# Altium PCB LC_FlowPCB_V6.3.PcbDoc
Units mil, origin at the board's own origin, x right, y up, seen from the top; angles counter-clockwise.
Board outline 984.25 x 984.25 mil, 4 copper layers (Top Layer, GND, VCC, Bottom Layer), stack 23.756 mil thick; 52 components, 43 nets, 210 pads, 96 vias.
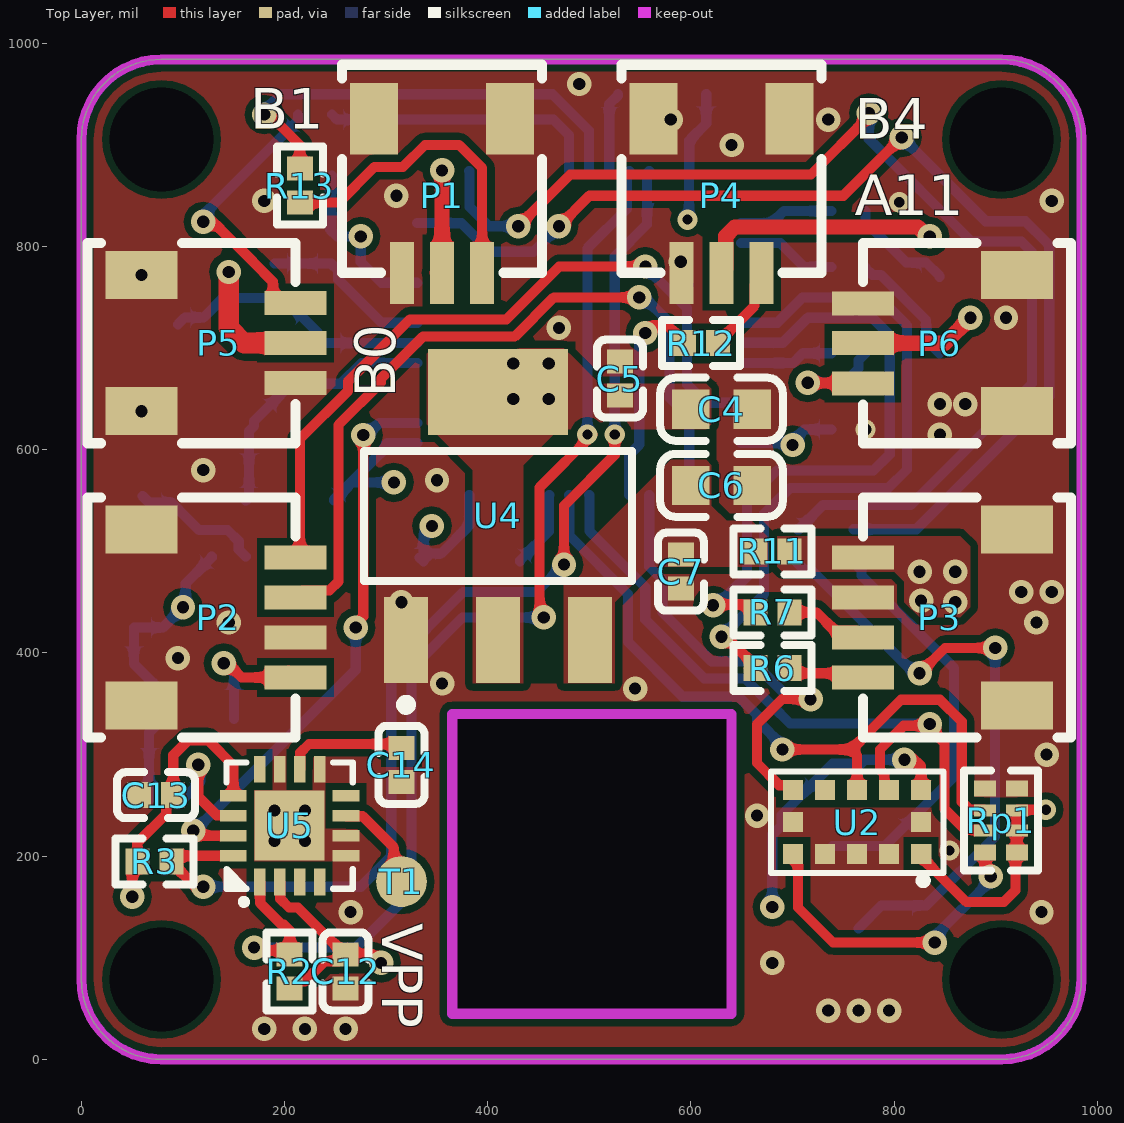
[diagram p0: Top Layer view]
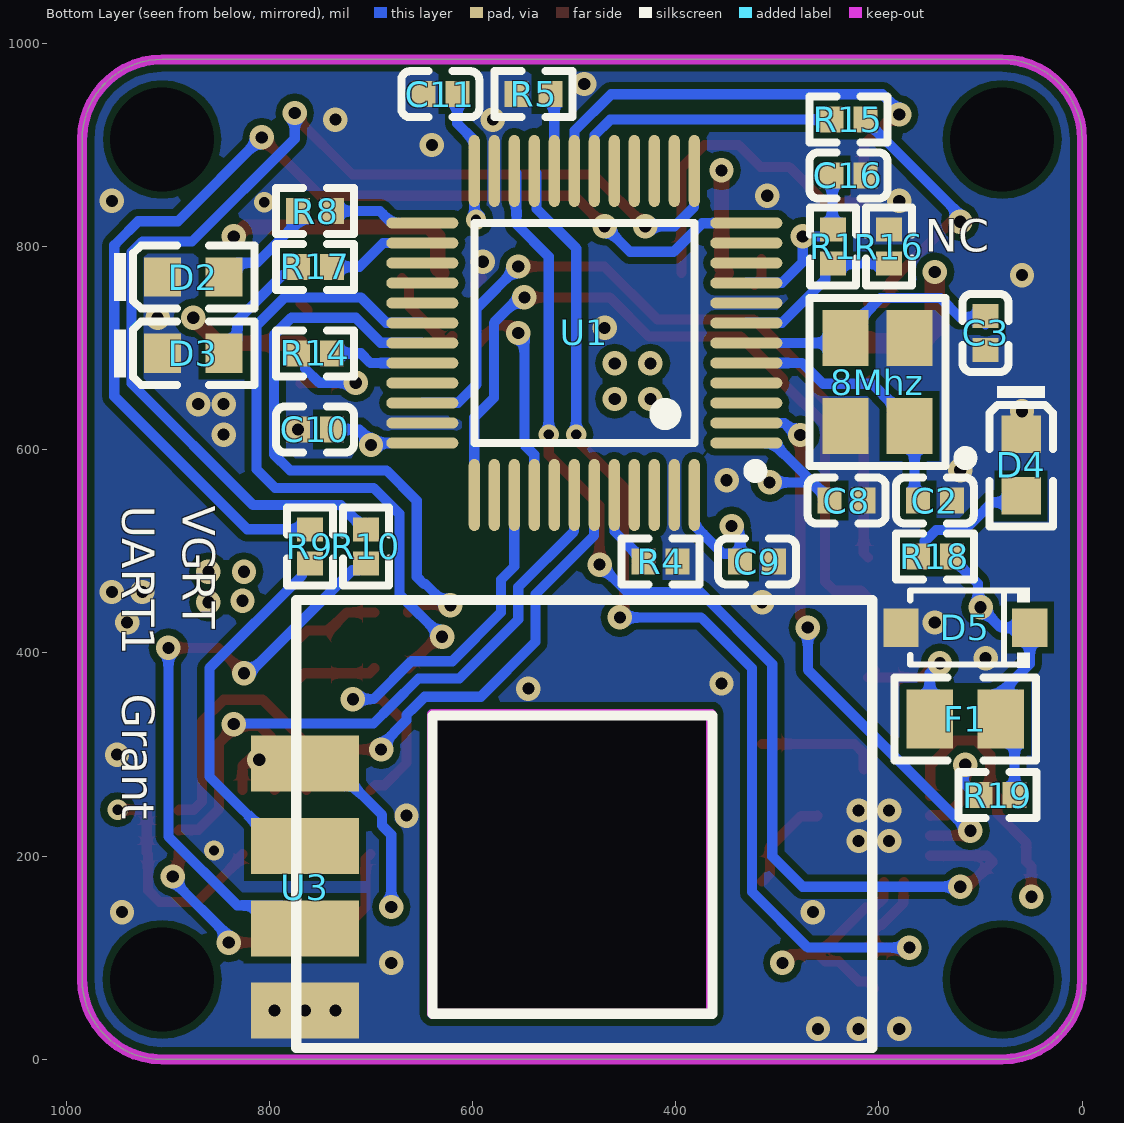
[diagram p1: Bottom Layer view, seen from below]
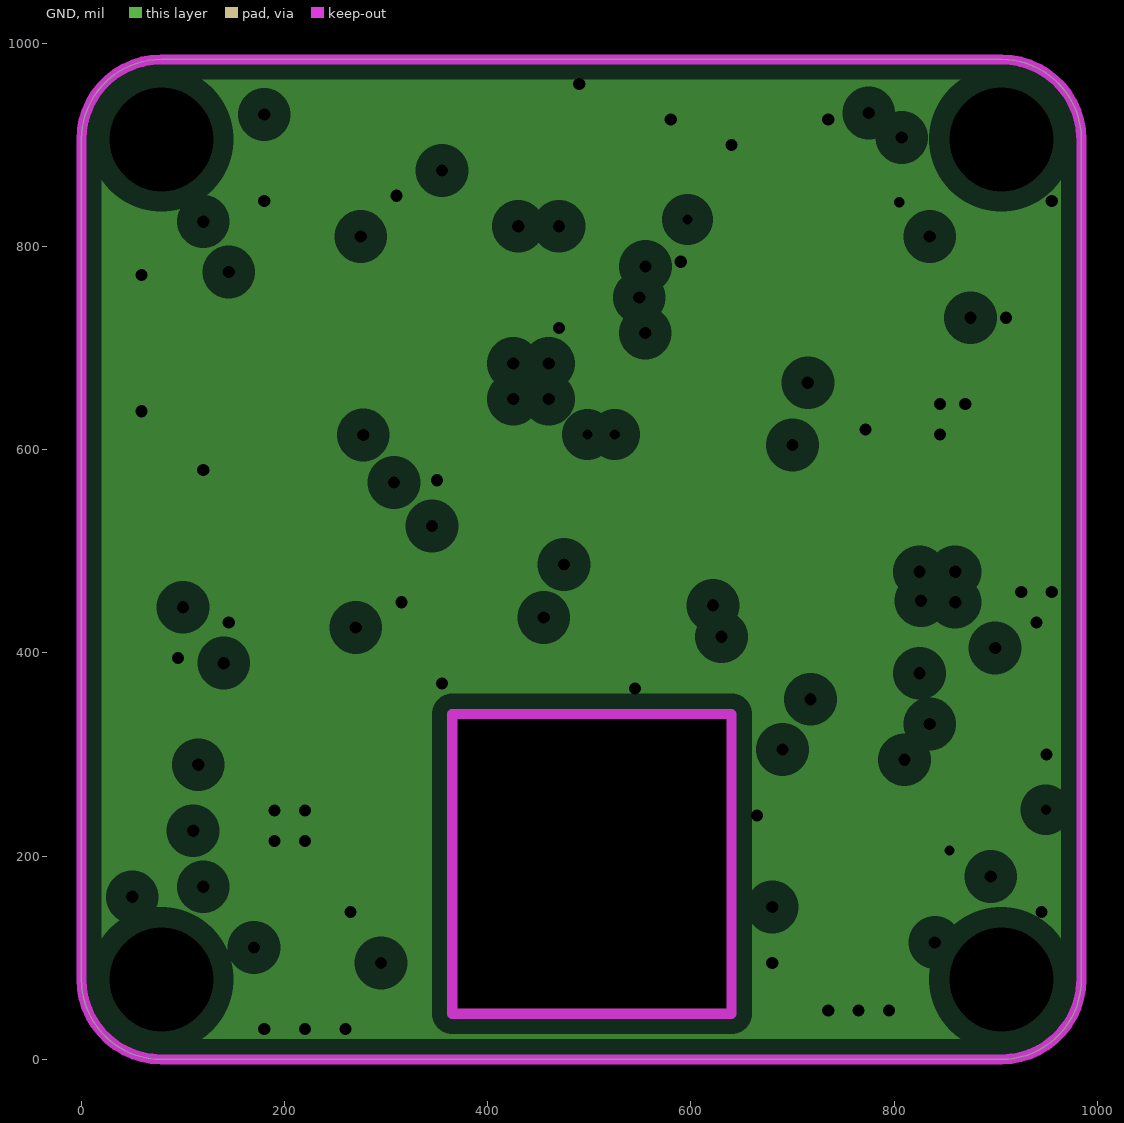
[diagram p2: GND, clearances drawn from the general rule]
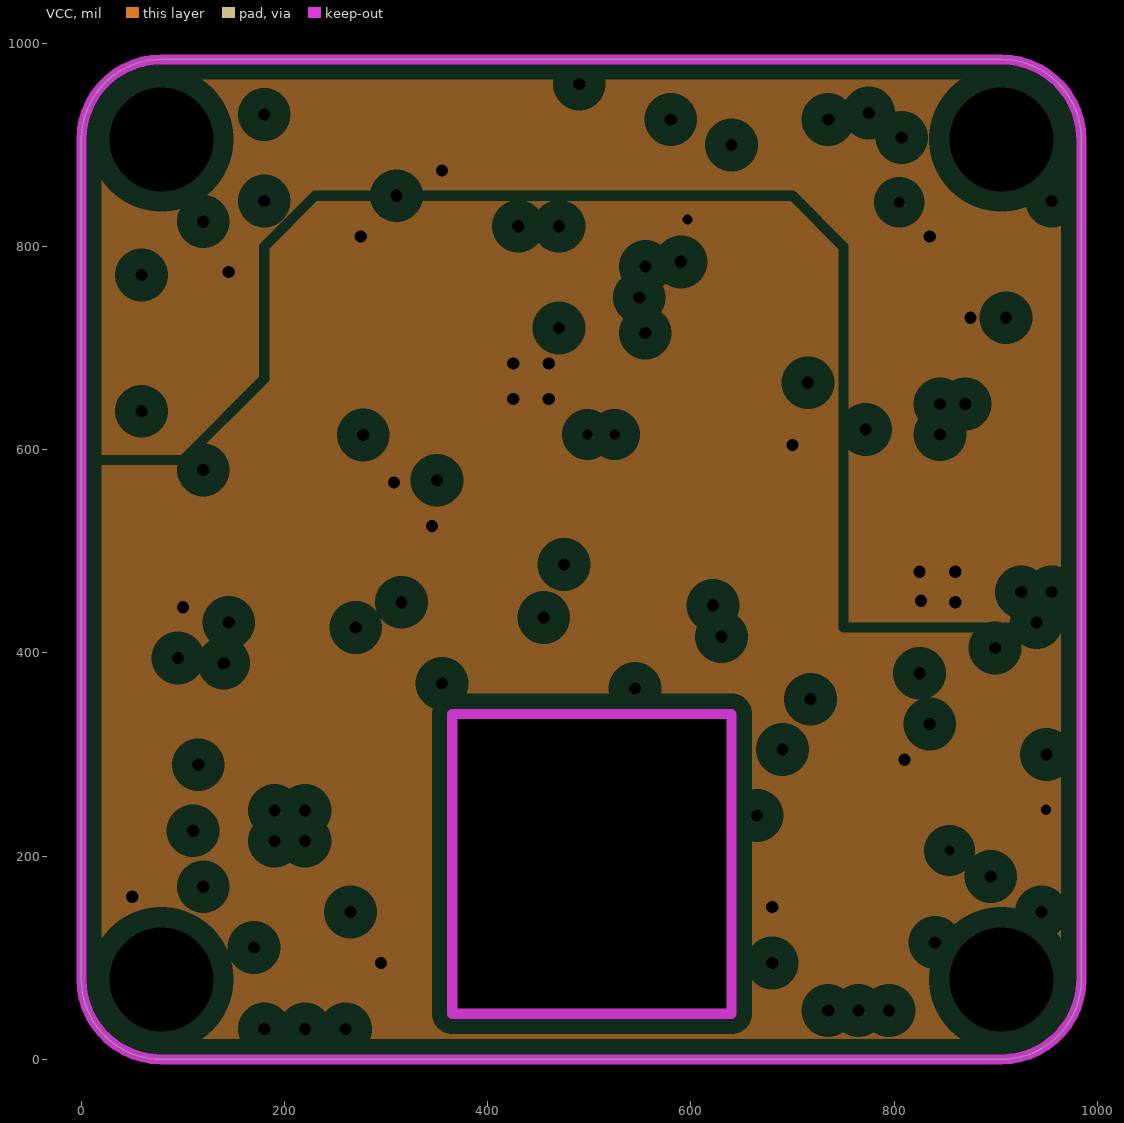
[diagram p3: VCC, clearances drawn from the general rule]
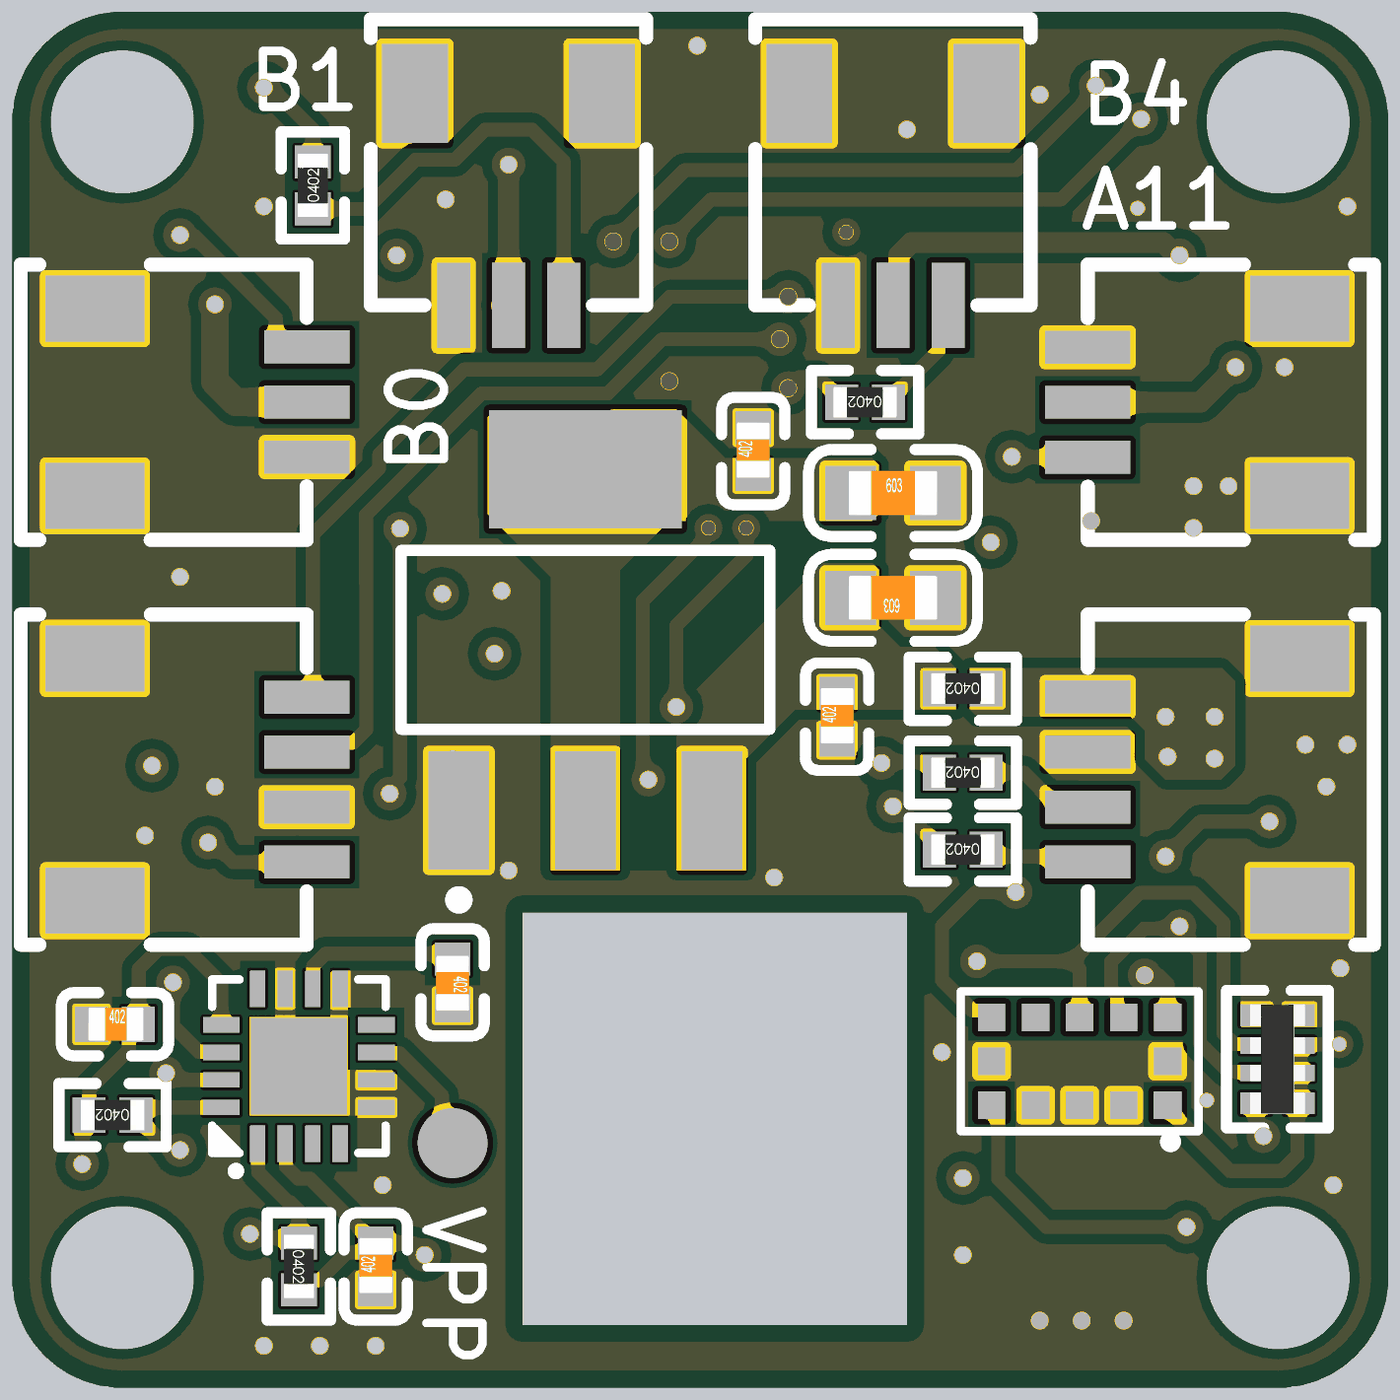
[diagram p4: 3D render of the assembled board from above, using the file's embedded part models]
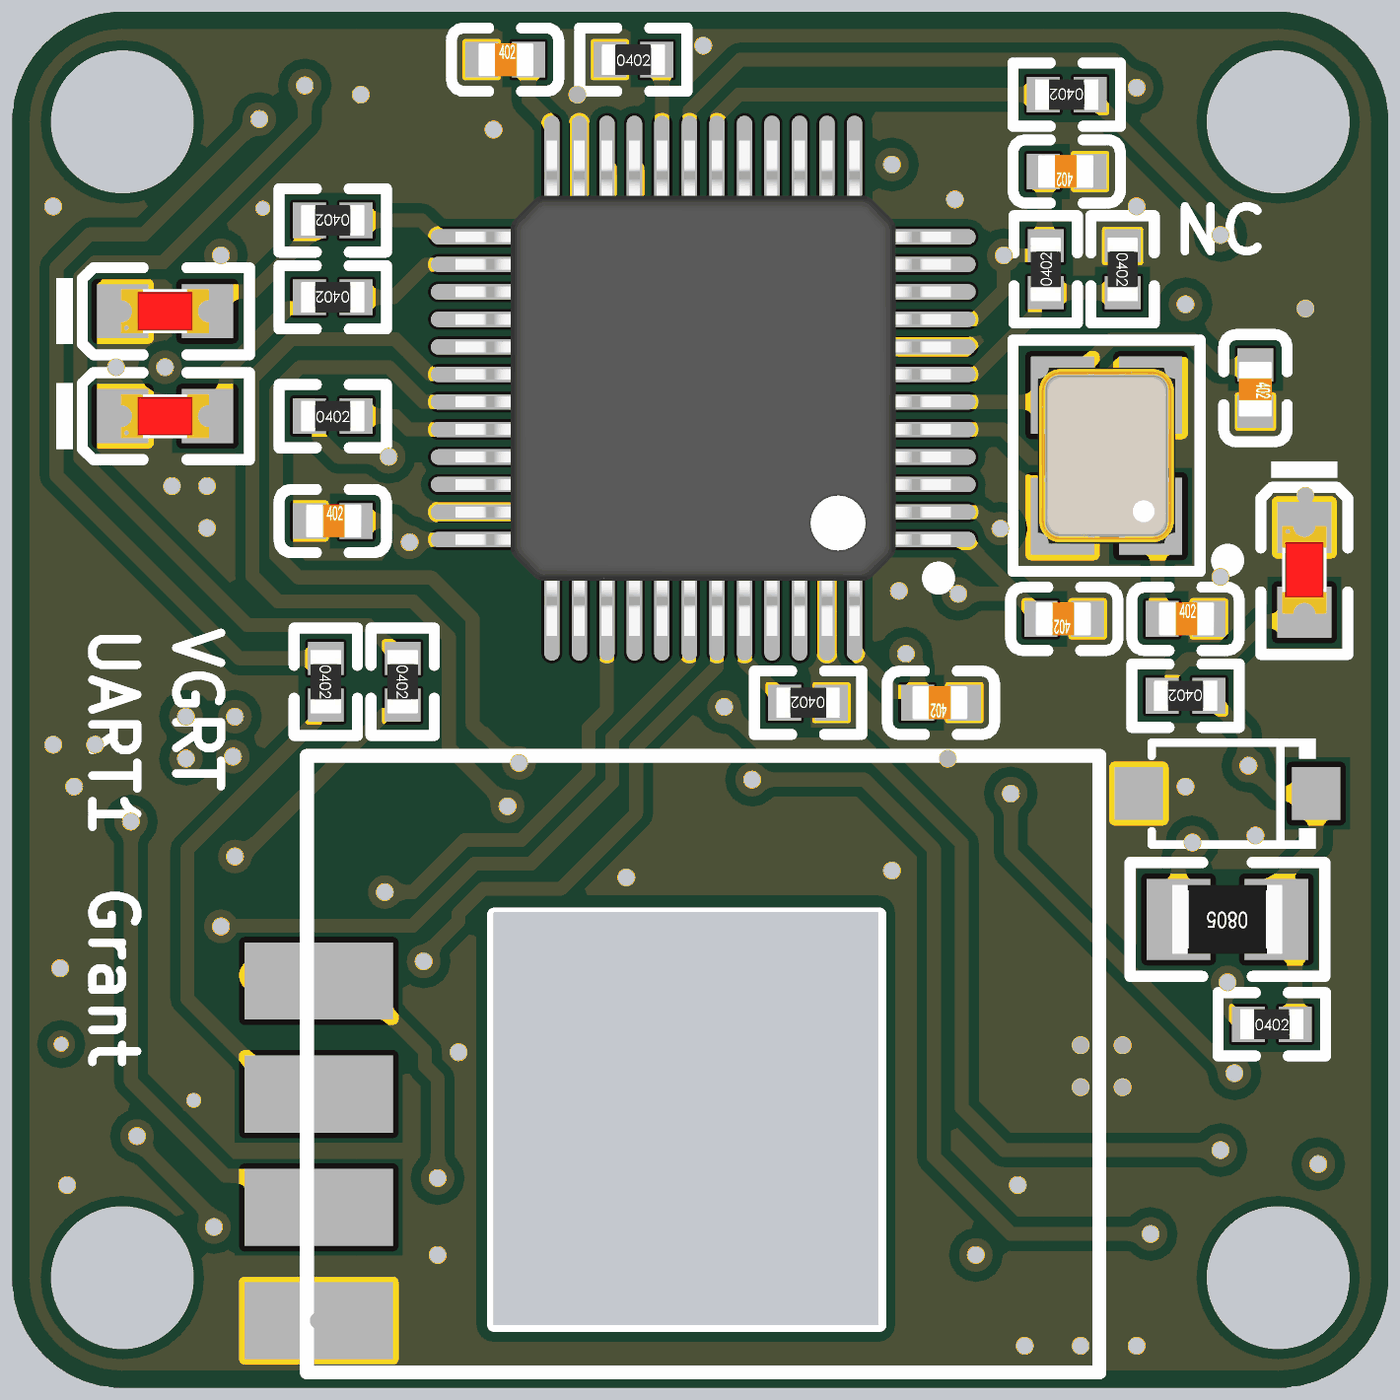
[diagram p5: 3D render of the assembled board from below, using the file's embedded part models]

## Layer stack, top to bottom
Top Solder: solder mask 0.4, Solder Resist, Dk 3.5
Top Layer: signal copper 1.4
Dielectric 2: prepreg 2.8, PP-006, Dk 4.1
GND: plane copper 1.378, net GND
Dielectric 1: dielectric 12.6, FR-4, Dk 4.8
VCC: plane copper 1.378, net (Multiple Nets)
Dielectric 3: prepreg 2.8, PP-006, Dk 4.1
Bottom Layer: signal copper 1.4
Bottom Solder: solder mask 0.4, Solder Resist, Dk 3.5

## Board outline
0,78.74 0,905.51 cw(c78.74,905.51) 78.74,984.25 905.51,984.25 cw(c905.51,905.51) 984.25,905.51 984.25,78.74 cw(c905.51,78.74) 905.51,0 78.74,0 cw(c78.74,78.74)
cut-out: 365,340 365,45 640,45 640,340

## Design rules (kind name [scope] priority, off if disabled: settings)
Clearance [All] p1: gap=7 ignorepadtopadclearanceinfootprint=TRUE
PlaneClearance [All] p1: clearance=20
PlaneConnect [All] p1: planeconnectstyle=Direct reliefexpansion=20 reliefentries=4 reliefconductorwidth=10 reliefairgap=10
PolygonConnect [All] p1: connectstyle=Direct reliefconductorwidth=10 reliefentries=4 polygonreliefangle="90 Angle" airgapwidth=10
RoutingVias [All] p1: holewidth=12 width=24 viastyle="Through Hole" minholewidth=12 minwidth=24 maxholewidth=28 maxwidth=50
SolderMaskExpansion [All] p1: expansion=4 istentingtop=FALSE
Width [All] p1: maxlimit=20 minlimit=10 preferedwidth=10
28 further rules are at their usual default settings.

## Components (designator, comment, footprint, x,y, rotation, side; value= is the part's Value field where it differs from the comment)
8Mhz "无源贴片晶振" SMD-3225_4P 201.5,666.69 r90 bottom
C2 "12pF/0402/50V" 0402_C 145,550 r180 bottom
C3 "12pF/0402/50V" 0402_C 95,715 r270 bottom
C4 "10uF/0603/10V" 0603_C 630,640 r0 top
C5 "100nF/0402/16V" 0402_C 530,670 r90 top
C6 "10uF/0603/10V" 0603_C 630,565 r180 top
C7 "100nF/0402/16V" 0402_C 590,480 r90 top
C8 "100nF/0402/16V" 0402_C 231.73,550 r0 bottom
C9 "100nF/0402/16V" 0402_C 320,490 r0 bottom
C10 "100nF/0402/16V" 0402_C 755,620 r180 bottom
C11 "100nF/0402/16V" 0402_C 631.73,950 r180 bottom
C12 "100nF/0402/16V" 0402_C 260,86.73 r90 top
C13 "100nF/0402/16V" 0402_C 73.46,260 r0 top
C14 "4.7uF/0402/10V" 0402_C 315,290 r270 top
C16 "100nF/0402/16V" 0402_C 230,870 r0 bottom
D2 "蓝灯 0603" 0603_LED_S1 875,770 r180 bottom
D3 "绿灯 0603" 0603_LED_S1 875,695 r180 bottom
D4 "红灯 0603" 0603_LED_S1 60,585 r270 bottom
D5 "MMSZ3V6CW" SOD-123 115,425 r0 bottom
F1 "自恢复保险丝/1A/0805/6V" 0805_R 115,335 r0 bottom
P1 "SH1.0-3" SH1.0-WS-3P 355,850 r180 top
P2 "SH1.0-4" SH1.0-WS-4P 134.94,435.01 r270 top
P3 "SH1.0-4" SH1.0-WS-4P 845.06,435.01 r90 top
P4 "SH1.0-3" SH1.0-WS-3P 630,850 r180 top
P5 "SH1.0-3" SH1.0-WS-3P 135,705 r270 top
P6 "SH1.0-3" SH1.0-WS-3P 845,704.94 r90 top
R1 "10KΩ/0402/1%" 0402_R 245,800 r90 bottom
R2 "4.7KΩ /0402/1%" 0402_R 205,86.73 r270 top
R3 "4.7KΩ /0402/1%" 0402_R 71.73,195 r180 top
R4 "10KΩ/0402/1%" 0402_R 415,490 r0 bottom
R5 "10KΩ/0402/1%" 0402_R 540,950 r180 bottom
R6 "33Ω/0402/1%" 0402_R 680,385 r180 top
R7 "33Ω/0402/1%" 0402_R 680,440 r180 top
R8 "1KΩ/0402/1%" 0402_R 755,835 r0 bottom
R9 "33Ω/0402/1%" 0402_R 760,505 r270 bottom
R10 "33Ω/0402/1%" 0402_R 705,505 r270 bottom
R11 "0Ω/0402/1%" 0402_R 680,500 r180 top
R12 "33Ω/0402/1%" 0402_R 610,705 r180 top
R13 "33Ω/0402/1%" 0402_R 215,860 r90 top
R14 "33Ω/0402/1%" 0402_R 755,695 r180 bottom
R15 "33Ω/0402/1%" 0402_R 230,925 r0 bottom
R16 "NC/10KΩ/0402/1%" 0402_R 190,800 r270 bottom
R17 "1KΩ/0402/1%" 0402_R 755,780 r0 bottom
R18 "1KΩ/0402/1%" 0402_R 145,495 r0 bottom
R19 "0Ω /0402/1%" 0402_R 83.27,260 r180 bottom
Rp1 "4.7KΩ/0402*4/5%" 0402_Rx4 905,235 r270 top
T1 "TEST" 测试点 315,175 r0 top
U1 "STM32F103C8T6" LQFP-48_7x7x05P 490,715 r90 bottom
U2 "VL53L1CXV0FY/1" LGA-12-2.5X4.9MM 763.51,233.51 r0 top
U3 "LC307" LC307 206.59,452 r0 bottom
U4 "AMS1117-3.3" SOT223 410,535 r0 top
U5 "LSM303D" "QFN-16 (3×3)" 205,230 r0 top

## Footprints (in the part's own frame and the unit in brackets; to place one, negate y for a bottom-side part, rotate by r counter-clockwise, add the part's x,y. Pads: shape width x height; smd on the part's side, far side on the other; paste and mask are expansions set on the pad)
0402_C [mm]
  rect 0.6x0.65 smd mask+0.051: 1(-0.425,0) 2(0.425,0)
  silkscreen extent -0.97,-0.58 0.97,0.58, body extent -0.48,-0.3 0.52,0.3, height 0.2
0402_R [mm]
  rect 0.6x0.65 smd mask+0.051: 1(-0.425,0) 2(0.425,0)
  silkscreen extent -0.97,-0.58 0.97,0.58, body extent -0.57,-0.27 0.58,0.28, height 0.41
0402_Rx4 [mm]
  rect 0.4x0.55 smd mask+0.051: 1(-0.8,-0.4) 4(0.8,-0.4) 5(0.8,0.4) 8(-0.8,0.4)
  rect 0.3x0.55 smd mask+0.051: 2(-0.25,-0.4) 3(0.25,-0.4) 6(0.25,0.4) 7(-0.25,0.4)
  silkscreen extent -1.25,-0.93 1.25,0.92, body extent -1,-0.5 1,0.5, height 0.45
0603_C [mm]
  rect 0.93x0.98 smd: 1(-0.77,0) 2(0.77,0)
  silkscreen extent -1.53,-0.79 1.54,0.79, body extent -0.8,-0.4 0.8,0.4, height 0.3
0603_LED_S1 [mm]
  rect 0.93x0.98 smd: A(0.77,0) K(-0.77,0)
  silkscreen extent -1.98,-0.79 1.54,0.79, body extent -0.8,-0.4 0.8,0.4, height 0.6
0805_R [mm]
  rect 1.16x1.47 smd: 1(-0.89,0) 2(0.89,0)
  silkscreen extent -1.77,-1.04 1.77,1.04, body extent -1,-0.63 1,0.62, height 0.49
LC307 [mm]
  rect 2.7x1.4 smd: 1(14.184,4.089) 2(14.184,6.147) 3(14.184,8.204) 4(14.184,10.262)
  silkscreen extent 0,0 14.4,11.2
LGA-12-2.5X4.9MM [mm]
  rect 0.508x0.5 smd: 1(1.6,-0.8)
  rect 0.5x0.5 smd: 2(0.8,-0.8) 3(0,-0.8) 4(-0.8,-0.8) 5(-1.6,-0.8) 6(-1.6,0) 7(-1.6,0.8) 8(-0.8,0.8) 9(0,0.8) 10(0.8,0.8) 11(1.6,0.8) 12(1.6,0)
  silkscreen extent -2.16,-1.52 2.16,1.27
LQFP-48_7x7x05P [mm]
  oval 0.28x1.8 smd mask+0.051: 1(-2.75,-4.05) 2(-2.25,-4.05) 3(-1.75,-4.05) 4(-1.25,-4.05) 5(-0.75,-4.05) 6(-0.25,-4.05) 7(0.25,-4.05) 8(0.75,-4.05) 9(1.25,-4.05) 10(1.75,-4.05) 11(2.25,-4.05) 12(2.75,-4.05) 25(2.75,4.05) 26(2.25,4.05) 27(1.75,4.05) 28(1.25,4.05) 29(0.75,4.05) 30(0.25,4.05) 31(-0.25,4.05) 32(-0.75,4.05) 33(-1.25,4.05) 34(-1.75,4.05) 35(-2.25,4.05) 36(-2.75,4.05)
  oval 1.8x0.28 smd mask+0.051: 13(4.05,-2.75) 14(4.05,-2.25) 15(4.05,-1.75) 16(4.05,-1.25) 17(4.05,-0.75) 18(4.05,-0.25) 19(4.05,0.25) 20(4.05,0.75) 21(4.05,1.25) 22(4.05,1.75) 23(4.05,2.25) 24(4.05,2.75) 37(-4.05,2.75) 38(-4.05,2.25) 39(-4.05,1.75) 40(-4.05,1.25) 41(-4.05,0.75) 42(-4.05,0.25) 43(-4.05,-0.25) 44(-4.05,-0.75) 45(-4.05,-1.25) 46(-4.05,-1.75) 47(-4.05,-2.25) 48(-4.05,-2.75)
  silkscreen extent -3.6,-4.42 2.75,2.75, body extent -4.5,-4.5 4.5,4.5, height 1.6
"QFN-16 (3×3)" [mm]
  rect 0.28x0.665 smd mask+0.051: 1(-0.75,-1.407) 2(-0.25,-1.407) 3(0.25,-1.407) 4(0.75,-1.407) 9(0.75,1.407) 10(0.25,1.407) 11(-0.25,1.407) 12(-0.75,1.407)
  rect 0.665x0.28 smd mask+0.051: 5(1.407,-0.75) 6(1.407,-0.25) 7(1.407,0.25) 8(1.407,0.75) 13(-1.407,0.75) 14(-1.407,0.25) 15(-1.407,-0.25) 16(-1.407,-0.75)
  rect 1.75x1.75 smd mask+0.051: 17(0,0)
  silkscreen extent -1.58,-1.98 1.58,1.58
SH1.0-WS-3P [mm]
  rect 0.6x1.55 smd: 1(-1.002,1.926) 2(0,1.924) 3(0.998,1.926)
  rect 1.199x1.798 smd: 4(1.702,-1.926)
  rect 1.201x1.798 smd: 5(-1.7,-1.926)
  silkscreen extent -2.5,-3.28 2.5,1.92
SH1.0-WS-4P [mm]
  rect 0.6x1.55 smd: 1(-1.5,1.924) 2(-0.5,1.924) 3(0.5,1.924) 4(1.5,1.924)
  rect 1.199x1.798 smd: 5(2.2,-1.924)
  rect 1.201x1.798 smd: 6(-2.2,-1.924)
  silkscreen extent -3,-3.27 3,1.92
SMD-3225_4P [mm] "晶振"
  rect 1.4x1.15 smd: 1(-1.1,-0.8) 2(1.1,-0.8) 3(1.1,0.8) 4(-1.1,0.8)
  silkscreen extent -2.1,-2.35 2.1,1.7, body extent -1.6,-1.25 1.6,1.25, height 0.61
SOD-123 [mm]
  rect 0.88x0.96 smd: 1(-1.61,0) 2(1.61,0)
  silkscreen extent -1.6,-1 1.38,1
SOT223 [mm] "SOT-223/SC-73; 4 Leads; Body 6.7 x 7.3 mm, inc. leads (LxW max)"
  rect 1.1x2.15 smd: 1(-2.3,-3.1) 2(0,-3.1) 3(2.3,-3.1)
  rect 3.5x2.15 smd: 4(0,3.1)
  silkscreen extent -3.35,-4.85 3.35,1.63, body extent -3.35,-3.17 3.35,3.3, height 1.8
测试点 [mil]
  round 50 smd mask+4: 1(0,0)

## Part data
8Mhz: library part XTAL_4, "25M/3225"
C2 C3: library part "0402 22pF (220) 5% 50V", "贴片电容", Package=0402, SuppliersPartNumber=C1555, ComponentLink1Description=供应商链接, ComponentLink1URL=http://www.szlcsc.com/product/details_1907.html, Supplier=LC
C4 C6: library part "0603 10uF (106) 10% 10V", "贴片电容", Package=0603, SuppliersPartNumber=C19702, ComponentLink1Description=供应商链接, ComponentLink1URL=http://www.szlcsc.com/product/details_20411.html, Supplier=LC
C5 C7 C8 C9 C10 C11 C12 C13 C16: library part "0402 100nF (104) 10% 16V", "贴片电容", Package=0402, SuppliersPartNumber=C1525, ComponentLink1Description=供应商链接, ComponentLink1URL=http://www.szlcsc.com/product/details_1877.html, Supplier=LC
C14: library part "0402 4.7uF (475) 20% 10V", "贴片电容", Package=0402, SuppliersPartNumber=C23733, ComponentLink1Description=供应商链接, ComponentLink1URL=http://www.szlcsc.com/product/details_24469.html, Supplier=LC
D2: library part "0603 蓝灯", "发光二极管", Package=0603, SuppliersPartNumber=C72041, ComponentLink1Description=供应商链接, ComponentLink1URL=http://www.szlcsc.com/product/details_73150.html, Supplier=LC
D3: library part "0603 绿灯", "发光二极管", Package=0603, SuppliersPartNumber=C72043, ComponentLink1Description=供应商链接, ComponentLink1URL=http://www.szlcsc.com/product/details_73152.html, Supplier=LC
D4: library part "0603 红灯", "发光二极管", Package=0603, SuppliersPartNumber=C2286, ComponentLink1Description=供应商链接, ComponentLink1URL=http://www.szlcsc.com/product/details_2659.html, Supplier=LC
D5: library part "LL-34 ZMM3V3", "稳压二极管", Package=LL-34, SuppliersPartNumber=C8056, ComponentLink1Description=供应商链接, ComponentLink1URL=http://www.szlcsc.com/product/details_8535.html, Supplier=LC
F1: library part FUSE/0805
P1 P4 P5 P6: "Header, 3-Pin", LatestRevisionDate=17-Jul-2002, LatestRevisionNote="Re-released for DXP Platform.", Publisher="Altium Limited"
P2 P3: "Header, 4-Pin", LatestRevisionDate=17-Jul-2002, LatestRevisionNote="Re-released for DXP Platform.", Publisher="Altium Limited"
R1 R4 R5 R16: library part "0402 10KΩ (1002) 1%", "贴片电阻", Package=0402, SuppliersPartNumber=C25744, ComponentLink1Description=供应商链接, ComponentLink1URL=http://www.szlcsc.com/product/details_26487.html, Supplier=LC
R2 R3 R19: library part "0402 4.7KΩ (4701) 1%", "贴片电阻", Package=0402, SuppliersPartNumber=C25900, ComponentLink1Description=供应商链接, ComponentLink1URL=http://www.szlcsc.com/product/details_26643.html, Supplier=LC
R6 R7 R9 R10 R11 R12 R13 R14 R15: library part "0402 33Ω (33R0) 1%", "贴片电阻", Package=0402, SuppliersPartNumber=C25105, ComponentLink1Description=供应商链接, ComponentLink1URL=http://www.szlcsc.com/product/details_25848.html, Supplier=LC
R8 R17 R18: library part "0402 1KΩ (1001) 1%", "贴片电阻", Package=0402, SuppliersPartNumber=C11702, ComponentLink1Description=供应商链接, ComponentLink1URL=http://www.szlcsc.com/product/details_12256.html, Supplier=LC
Rp1: library part "0402*4 1KΩ (102) 5%_1", "贴片排阻", Package=0402*4, SuppliersPartNumber=C25726, ComponentLink1Description=供应商链接, ComponentLink1URL=http://www.szlcsc.com/product/details_26469.html, Supplier=LC
T1: library part 测试点, "测试点"
U1: "ARM", Package=LQFP-48_7x7x05P, SuppliersPartNumber=C8734, ComponentLink1Description=供应商链接, ComponentLink1URL=http://www.szlcsc.com/product/details_9243.html, Supplier=LC
U2: "激光测距模块"
U3: "光流模块"
U4: "LDO"
U5: library part IST8310, "磁力计"

## Free pads (board coordinates)
  round 0 hole 102.36 unplated: 6(78.74,78.74) 6(78.74,905.51) 6(905.51,78.74) 6(905.51,905.51)

## Via types
v1: diameter 24, hole 12, Top Layer to Bottom Layer, tented both sides, 89 vias
v2: diameter 20, hole 10, Top Layer to Bottom Layer, tented both sides, 6 vias
v3: diameter 20, hole 12, Top Layer to Bottom Layer, tented both sides, 1 vias

## Nets (pads, with @x,y where several pads share a name; then routed paths per layer and width w, separated by ;. In a path a pad name is that pad's centre, name@x,y a point inside that pad or via, vN(x,y) a via of type N, cw(c..) or ccw(c..) an arc to the next point about the centre after c; other vN are vias at no path point)
3V3: C4.1 C5.1 C8.2 C9.2 C10.2 C11.2 C12.2 C13.2 C16.2 D5.1 F1.1 R1.2 R2.2 R3.2 R18.1 R19.2 Rp1.5 Rp1.6 Rp1.7 U1.1 U1.9 U1.24 U1.36 U1.48 U2.1 U2.11 U3.1 U4.2 U4.4 U5.2 U5.13 | length 1988.6
  Top Layer w10: v1(50,160) 50,190 R3.2 55,213.11 83.39,241.5 83.39,258.77 91.43,266.81 90.44,267.8 90.44,299.38 105.06,314 124.94,314 149.59,289.35 U5.13 ; U5.2 195.67,174.08 195.67,158.18 204.36,149.5 212.98,149.5 259.02,103.46 C12.2 ; R2.2 211.81,76.81 219.92,76.81 239.77,96.65 253.19,96.65 C12.2 ; v1(295,95) 286.54,103.46 C12.2 ; v1(810,295) 820,295 826.5,288.5 U2.11 ; U2.1 831.38,197.14 831.38,194.68 871.06,155 907.88,155 919.36,166.48 919.36,202.12 Rp1.5 Rp1.6 Rp1.7 921.65,245.75 v2(949.25,245.75)
  Bottom Layer w10: R19.2@66.54,255 66.54,321.57 F1.1 ; F1.1@79.92,355 79.92,361.1 51.61,389.41 D5.1 80,425 v1(100,445) 102.68,447.68 102.68,468.43 128.27,494.02 R18.1 ; C16.2 245.87,869.13 245.87,817.6 R1.2 251.81,809.92 259.92,809.92 260,810 v1(275,810) 275,784.76 295.35,764.41 330.36,764.41 U1.9 ; v1(307.59,567.9) 266.36,567.9 C8.2 248.46,550.98 300.43,602.95 300.43,606.26 300.91,606.73 U1.1 ; C9.2@332.68,494.05 C9.2 C9.2@336.73,490.98 ; v1(345,525) 336.73,516.73 C9.2@336.73,490.98 ; U1.48 381.73,525.63 353.9,497.8 343.54,497.8 C9.2@336.73,490.98 ; v2(596.54,826.54) 592.68,830.39 598.07,835.78 598.07,874.25 U1.24 598.27,904.37 615,921.1 C11.2 ; U1.36 694.24,606.73 700,600.97 v1(700,604.76) 700,608.54 711.46,620 C10.2 ; v1(680,150) 680,221.06 689,230.06 689,240.59 739.41,291 U3.1 766,290 771,295 v1(810,295)
  other v1: 425,650 460,650 425,685 460,685
3V3_SWD: F1.2 P2.4 | length 145.3
  Top Layer w10: v1(140.04,390) 143.83,390 157.88,375.95 P2.4 P2.4@203.9,382.75
  Bottom Layer w10: v1(140.04,390) 150.04,380 F1.2
5V: C6.2 C7.2 R11.2 U4.3
5V_UART: P1.2 P3.4 P4.2 P5.2 P6.2 R11.1 | length 601.7
  Top Layer w15: P1.2@355,769.24 350,774.24 355,779.24 v1(355,875) ; P4.2 634.31,778.54 634.31,810.4 643.09,819.19 823.38,819.19 832.56,810 v1(835,810) ; P6.2 849.94,704.94 v1(875,730)
  Top Layer w20: v1(145,775) 145,720 160,705 P5.2 P5.2@208.96,706.81
  other v1: 860,450 826.44,451.44 825,480 860,480
BOOT0: R4.2 U1.44 | length 77.5
  Bottom Layer w10: R4.2 431.73,490.98 460.28,519.53 460.28,555.36 U1.44
BOOT1: R5.2 U1.20 | length 79.2
  Bottom Layer w10: U1.20 519.53,940.28 528.27,949.02 R5.2@528.27,950
DRDY(PC13): U1.2 U5.15 | length 559.5
  Top Layer w10: v1(110,225) 114.84,220.16 U5.15 ; v1(270,425) 270,428.79 277.4,436.19 v1(277.4,614.55)
  Bottom Layer w10: v1(110,225) 111.58,225 270,383.42 v1(270,425) ; v1(277.4,614.55) 281.19,614.55 292.86,626.22 330.36,626.22 U1.2
GND: 8Mhz.2 8Mhz.4 C2.2 C3.2 C4.2 C5.2 C6.1 C7.1 C8.1 C9.1 C10.1 C11.1 C12.1 C13.1 C14.2 C16.1 D2.K D3.K D4.K D5.2 P1.3 P1.4 P1.5 P2.3 P2.5 P2.6 P3.3 P3.5 P3.6 P4.3 P4.4 P4.5 P5.3 P5.4 P5.5 P6.3 P6.4 P6.5 R4.1 R5.1 R16.1 Rp1.1 Rp1.8 U1.8 U1.23 U1.35 U1.47 U2.2 U2.3 U2.4 U2.6 U2.12 U3.4 U4.1 U5.5 U5.6 U5.9 U5.11 U5.17 | length 51.6
  Top Layer w10: P5.3@207.96,668.57 P5.3 ; P1.3@315.71,787.88 315.71,769.18 P1.3@322.52,762.36 ; P4.3@590.71,769.18 P4.3@597.52,762.36 ; P6.3@762.36,737.42 P6.3
  other v1: 180,30 220,30 260,30 735,48 765,48 795,48 680,95 265,145 945,145 190,215 220,215 665,240 190,245 220,245 950,300 545,365 355,370 95,395 145,430 940,430 315,450 925,460 955,460 350,570 120,580 845,615 59.17,638.01 845,645 870,645 470,720 910,730 59.17,771.93 590,785 180,845 955,845 310,850 640,900 580,925 735,925 490,960
  other v2: 854.44,205.56 805,843.69
  other v3: 771.73,620
GPIO1: U1.39 U2.7 | length 449.9
  Top Layer w10: U2.7 695.68,269.84 686.9,269.84 665,291.74 665,330 689.56,354.56 v1(717.77,354.56)
  Bottom Layer w10: U1.39 558.9,485.14 572,472.04 572,439.97 620.06,391.91 660.21,391.91 697.57,354.56 v1(717.77,354.56)
I2C1_SCL: Rp1.3 U1.42 U2.10 | length 709.2
  Top Layer w10: U2.10 790.16,269.84 790.16,280.9 786,285.06 786,304.94 809.47,328.41 833.41,328.41 v1(835,330) 835,326.21 849.43,311.79 849.43,246.61 869.97,226.06 888.35,226.06 Rp1.3
  Bottom Layer w10: U1.42 500.04,555.36 500.04,519.96 555,465 555,432.93 613.02,374.91 653.17,374.91 680.02,348.06 697.52,330.56 834.44,330.56 v1(835,330)
I2C1_SDA: Rp1.2 U1.43 U2.9 | length 723.2
  Top Layer w10: v1(690,305) 757.62,305 ; U2.9 763.51,299.11 757.62,305 ; Rp1.2 888.35,245.75 874.33,245.75 866.43,253.65 866.43,332.52 844.94,354 806.62,354 757.62,305
  Bottom Layer w10: U1.43 480.35,555.36 480.35,515.61 538,457.96 538,410.92 591.92,357 647.04,357 657,347.04 665.14,338.9 665.14,333.65 690,308.79 v1(690,305)
I2C2_SCL: R2.1 U1.21 U5.1 | length 1155.3
  Top Layer w10: v1(170,110) 172.68,107.32 201.14,107.32 R2.1 205,126.64 199.14,132.5 197.32,132.5 175.98,153.83 175.98,174.08 U5.1 ; v1(455,435) 451,439 451,563 503,615 v2(498,615)
  Bottom Layer w10: v1(170,110) 270,110 325,165 325,385 375,435 v1(455,435) ; v2(498,615) 498,798.23 537.04,837.27 537.04,872.28 U1.21
I2C2_SDA: R3.1 U1.22 U5.16 | length 1127.6
  Top Layer w10: v1@120,172.48 v1(120,170) 117.32,172.68 109.8,172.68 88.46,194.02 R3.1 93.93,200.47 U5.16 ; v1(475,487.02) 475,545 525,595 v2(525,615)
  Bottom Layer w10: v1(120,170) 275,170 305,200 305,389.04 375.96,460 447.98,460 v1(475,487.02) ; v2(525,615) 525,790.12 556.72,821.84 556.72,872.28 U1.22
LED1(PB12): R8.1 U1.25 | length 93.7
  Bottom Layer w10: U1.25 679.65,823.27 691.38,835 R8.1
LED2(PB13): R17.1 U1.26 | length 98.6
  Bottom Layer w10: U1.26 649.64,803.39 688.07,803.39 711.46,780 R17.1
Net8Mhz_1: 8Mhz.1 C2.1 U1.5 | length 266
  Bottom Layer w10: C2.1 165,553.27 165,618.39 8Mhz.1 170,628.31 206.69,665 255.16,665 275.63,685.47 U1.5
Net8Mhz_3: 8Mhz.3 C3.1 U1.6 | length 267.6
  Bottom Layer w10: C3.1@95,723.46 101.81,730.28 120.28,730.28 139.56,749.56 198.35,749.56 232.99,714.92 8Mhz.3 237.83,705.16 U1.6
NetC14_1: C14.1 U5.10 | length 119.9
  Top Layer w10: U5.10 215.35,285.92 215.35,301.8 224.05,310.5 314.81,310.5 C14.1@315,310.32
NetD2_A: D2.A R8.2 | length 106.7
  Bottom Layer w10: R8.2 771.73,824.33 811.77,784.29 831.38,784.29 844.68,770.98 D2.A
NetD3_A: D3.A R17.2 | length 120.1
  Bottom Layer w10: R17.2 771.73,779.02 778.54,772.2 786.84,772.2 831.38,727.66 831.38,708.31 D3.A
NetD4_A: D4.A R18.2 | length 131.2
  Bottom Layer w10: D4.A 66.43,548.26 88.43,548.26 104.46,532.23 115.61,521.08 143.77,521.08 154.92,509.92 154.92,501.81 R18.2
NetP1_1: P1.1 R13.1 | length 315.5
  Top Layer w10: R13.1 253.27,843.27 288.43,878.43 316.58,878.43 338.15,900 371.74,900 394.46,877.28 P1.1
NetP3_1: P3.1 R6.1 | length 76.3
  Top Layer w10: R6.1 701.73,380 765.27,380 P3.1
NetP3_2: P3.2 R7.1 | length 82.8
  Top Layer w10: R7.1 723.54,440 741.4,422.15 762.48,422.15 P3.2
NetP4_1: P4.1 R12.1 | length 91.5
  Top Layer w10: R12.1@619.92,711.81 R12.1 626.73,705.98 662.64,741.9 662.64,762.36 P4.1@669.46,769.18
NetP5_1: P5.1 R15.1 | length 276.4
  Top Layer w10: v1(120,824.54) 129.4,824.54 169,784.94 169,784.88 188.47,765.41 188.47,751.27 195.28,744.46 P5.1
  Bottom Layer w10: v1(120,824.54) 120,831.06 213.27,924.33 R15.1@213.27,930
NetP6_1: P6.1 R14.1 | length 127.9
  Top Layer w10: v1(715,665.95) 715.24,665.72 768.93,665.72 P6.1
  Bottom Layer w10: v1(715,665.95) 750.8,665.95 764.92,680.08 764.92,688.19 R14.1
NetT1_1: T1.1 U5.7 | length 96.8
  Top Layer w10: U5.7 260.92,239.33 276.82,239.33 307.35,208.8 307.35,182.65 T1.1
RESET: R1.1 R16.2 U1.7 | length 169.9
  Bottom Layer w10: R16.2 R1.1 245.98,783.27 252.8,776.46 252.8,767.6 295.35,725.04 330.36,725.04 U1.7
RESET_D: R19.1 U5.14 | length 116.5
  Top Layer w10: v1(115,290) 115,258.55 133.2,240.35 149.08,240.35 U5.14
  Bottom Layer w10: R19.1@100,255 100,255.98 116.81,272.8 116.81,288.19 v1(115,290)
SWCLK: P2.2 U1.37 | length 771
  Top Layer w10: P2.2 217.51,461.49 244.04,461.49 253.22,470.67 253.22,574.78 253,575 253,624.55 294.57,666.12 294.57,669.8 336.13,711.37 426.37,711.37 465,750 v1(549,750)
  Bottom Layer w10: v1(549,750) 553.94,750 579,724.94 579,651 598.27,631.73 U1.37
SWDIO: P2.1 U1.34 | length 728.1
  Top Layer w10: P2.1 215,498.34 215,610.59 262.5,658.09 262.5,667.5 323.37,728.37 418.37,728.37 470.4,780.4 v1(555.08,780.4)
  Bottom Layer w10: v1(555.08,780.4) 596,739.48 596,664.55 614.25,646.3 649.25,646.3 U1.34
TIM1_CH4(PA11): R14.2 U1.32 | length 92.8
  Bottom Layer w10: U1.32 700.58,685.47 710.11,695 R14.2
TIM3_CH1(PB4): R12.2 U1.40 | length 215.4
  Top Layer w10: v1(555,715) 562.8,722.8 576.46,722.8 593.27,705.98 R12.2
  Bottom Layer w10: U1.40 539.21,595.27 549,605.06 549,709 v1(555,715)
TIM3_CH3(PB0): R15.2 U1.18 | length 276.9
  Bottom Layer w10: R15.2@246.73,930 251.73,925 464.61,925 479.96,909.65 479.96,874.64 U1.18
TIM3_CH4(PB1): R13.2 U1.19 | length 457.3
  Top Layer w10: v1(180,930) 185,930 215,900 R13.2
  Bottom Layer w10: v1(180,930) 183.31,930 185,931.69 185,938.31 196.69,950 463.65,950 499.65,914 499.65,874.64 U1.19 U1.19@499.65,874.25
USART1_RX: R7.2 U1.31 | length 623.8
  Top Layer w10: v1(621.8,446.91) 621.8,443.34 620.36,441.91 626.25,447.8 656.46,447.8 663.27,440.98 R7.2
  Bottom Layer w10: v1(621.8,446.91) 621.8,443.34 620.36,441.91 646.38,467.93 647.93,467.93 655,475 655,550 684.54,579.54 779.54,579.54 795.54,595.54 795.54,712.77 778.31,730 715,730 690.35,705.35 649.64,705.35 U1.31
USART1_TX: R6.2 U1.30 | length 671.1
  Top Layer w10: v1(630,415.91) 634.4,415.91 656.46,393.86 656.46,391.81 R6.2
  Bottom Layer w10: v1(630,415.91) 672,457.91 672,537 697.54,562.54 794.46,562.54 812.54,580.63 812.54,722.46 785,750 710,750 685.04,725.04 649.64,725.04 U1.30
USART2_RX: R10.1 U1.13 | length 1136.2
  Top Layer w10: v1(430,820) 481,871 718.12,871 775,927.88 v1(775,931.5)
  Bottom Layer w10: U1.13 381.93,874.25 381.93,839.25 401.18,820 v1(430,820) ; R10.1 705.98,521.73 729.8,545.54 815.96,545.54 935.62,665.2 935.62,794.38 925,805 876.06,805 775,906.06 v1(775,931.5)
USART2_RX_I: R10.2 U3.3 | length 607
  Top Layer w10: v1(825,380) 850,405 v1(899.37,405)
  Bottom Layer w10: R10.2 711.81,481.46 718.54,481.46 817.32,382.68 822.32,382.68 v1(825,380) ; U3.3 787.56,151.56 831.56,151.56 899.37,219.37 v1(899.37,405)
USART2_TX: R9.1 U1.12 | length 1120
  Top Layer w10: v1(470,820) 500,850 750,850 v1(807.5,907.5)
  Bottom Layer w10: U1.12 330.75,823.07 374.07,823.07 402.14,795 445,795 v1(470,820) ; R9.1 821.73,521.73 952.62,652.62 952.62,801.3 950,803.93 950,804.04 929.04,825 890,825 v1(807.5,907.5)
USART2_TX_I: R9.2 U3.2 | length 399.4
  Bottom Layer w10: U3.2@739.41,210 U3.2 790.59,210 859,278.41 859,384.94 767.8,476.15 767.8,481.46 760.98,488.27 R9.2
XSHUT: Rp1.4 U2.5 | length 317.1
  Top Layer w10: U2.5 705.36,197.17 705.36,149.44 739.8,115 v1(840,115) ; Rp1.4 889.35,203.41 889.35,185.65 v1(895,180)
  Bottom Layer w10: v1(840,115) 840,121.06 895,176.06 v1(895,180)
pads on no net: U1.3 U1.4 U1.10 U1.11 U1.14 U1.15 U1.16 U1.17 U1.27 U1.28 U1.29 U1.33 U1.38 U1.41 U1.45 U1.46 U2.8 U5.3 U5.4 U5.8 U5.12

## Polygon pours and split planes (outlines as drawn)
GND on Top Layer "NONET_L-01_P-001" (solid, remove dead copper, pour order 13): 0,0 985,0 985,985 0,985
5V_UART on Top Layer "NONET_L-01_P-001" (solid, remove dead copper, pour order 12): 685,515 865,515 875,505 875,445 865,435 825,435 810,450 810,470 800,480 690,480 685,485
no net on Top Layer "NONET_L-01_P-001" (solid, pour order 9): 855,655
no net on Top Layer "NONET_L-01_P-001" (solid, pour order 4): 855,655
3V3 on Top Layer "NONET_L-01_P-001" (solid, remove dead copper, pour order 2): 385,370 385,580 340,625 340,700 475,700 485,690 510,665 615,665 620,660 620,625 615,620 470,620 435,585 435,370
5V on Top Layer "NONET_L-01_P-001" (solid, remove dead copper, pour order 1): 675,485 675,515 660,530 635,530 620,545 620,585 615,590 580,590 475,485 475,370 525,370 525,450 560,485
GND on Bottom Layer "NONET_L-01_P-001" (solid, remove dead copper, pour order 14): 0,0 985,0 985,980 980,985 0,985
GND on GND (split plane): 922.62,961.9 933.29,957.48 942.89,951.06 951.06,942.89 957.48,933.29 961.9,922.62 964.16,911.29 964.16,905.51 964.16,78.74 964.16,72.96 961.9,61.63 957.48,50.96 951.06,41.36 942.89,33.19 933.29,26.77 922.62,22.35 911.29,20.1 72.96,20.1 61.63,22.35 50.96,26.77 41.36,33.19 33.19,41.36 26.77,50.96 22.35,61.63 20.1,72.96 20.1,78.74 20.1,905.51 20.1,911.29 22.35,922.62 26.77,933.29 33.19,942.89 41.36,951.06 50.96,957.48 61.63,961.9 72.96,964.16 911.29,964.16
5V_UART on VCC (split plane): 922.62,961.9 933.29,957.48 942.89,951.06 951.06,942.89 957.48,933.29 961.9,922.62 964.16,911.29 964.16,905.51 964.16,430.1 755.1,430.1 755.1,495 755.1,800 754.71,801.95 753.6,803.6 703.6,853.6 701.95,854.71 700,855.1 230,855.1 228.05,854.71 226.4,853.6 176.4,803.6 175.29,801.95 174.9,800 174.9,672.11 97.89,595.1 20.1,595.1 20.1,905.51 20.1,911.29 22.35,922.62 26.77,933.29 33.19,942.89 41.36,951.06 50.96,957.48 61.63,961.9 72.96,964.16 911.29,964.16
3V3 on VCC (split plane): 744.9,797.89 744.9,495 744.9,425 745.29,423.05 746.4,421.4 748.05,420.29 750,419.9 964.16,419.9 964.16,78.74 964.16,72.96 961.9,61.63 957.48,50.96 951.06,41.36 942.89,33.19 933.29,26.77 922.62,22.35 911.29,20.1 72.96,20.1 61.63,22.35 50.96,26.77 41.36,33.19 33.19,41.36 26.77,50.96 22.35,61.63 20.1,72.96 20.1,78.74 20.1,584.9 100,584.9 101.95,585.29 103.6,586.4 183.6,666.4 184.71,668.05 185.1,670 185.1,797.89 232.11,844.9 697.89,844.9

## Keep-outs
Keep-Out Layer:
  lines w10: 0,78.74 ccw(c78.74,78.74) 78.74,0 905.51,0 ccw(c905.51,78.74) 984.25,78.74 984.25,905.51 ccw(c905.51,905.51) 905.51,984.25 78.74,984.25 ccw(c78.74,905.51) 0,905.51 0,78.74 ; 365,45 365,340 640,340 640,45 365,45

## Other copper
Top Layer:
  pour cut-out: 442.14,370 467.86,370 467.86,415.44 465.81,415.44 463.45,417.8 461.28,415.63 448.72,415.63 446.55,417.8 444.19,415.44 442.14,415.44
  pour cut-out: 624.99,613.71 624.99,591.29 620.85,591.29 614.3,597.84 614.3,612.86
Bottom Layer:
  pour cut-out: 109.8,370.94 120.2,370.94 120.2,312.28 117.03,309.11 115.27,309.11 112.09,312.28 109.8,312.28
VCC (plane layer: these items are gaps in the copper):
  lines w10: 0,590 100,590 180,670 180,800 230,850 700,850 750,800 750,495 750,425 985,425

## Silkscreen, mask and mechanical layers (free items; w line width, h text height)
Top Overlay:
  text "B1" at 166,916 h40
  text "B4" at 761,906 h40
  text "A11" at 761,831 h40
  text "B0" at 309,651 h40 r90
  text "VPP" at 296,134 h40 r270
Bottom Overlay:
  text "NC" at 155,795 h32
  text "VGRT" at 885,545 h32 r90
  text "UART1" at 945,545 h32 r90
  text "Grant" at 945,360 h32 r90
Mechanical 1:
  lines w10: 0,78.74 ccw(c78.74,78.74) 78.74,0 905.51,0 ccw(c905.51,78.74) 984.25,78.74 984.25,905.51 ccw(c905.51,905.51) 905.51,984.25 78.74,984.25 ccw(c78.74,905.51) 0,905.51 0,78.74 ; 365,45 640,45 640,340 365,340 365,45

## Dimensions
78.74,78.74 to 905.51,78.74 on Mechanical 1
0,78.74 to 984.25,78.74 on Mechanical 1